# Altium PCB PCB.PcbDoc
Units mm, origin at the board's own origin, x right, y up, seen from the top; angles counter-clockwise.
Board outline 50 x 25.02 mm, 2 copper layers (Top Layer, Bottom Layer); 26 components, 21 nets, 92 pads, 11 vias.
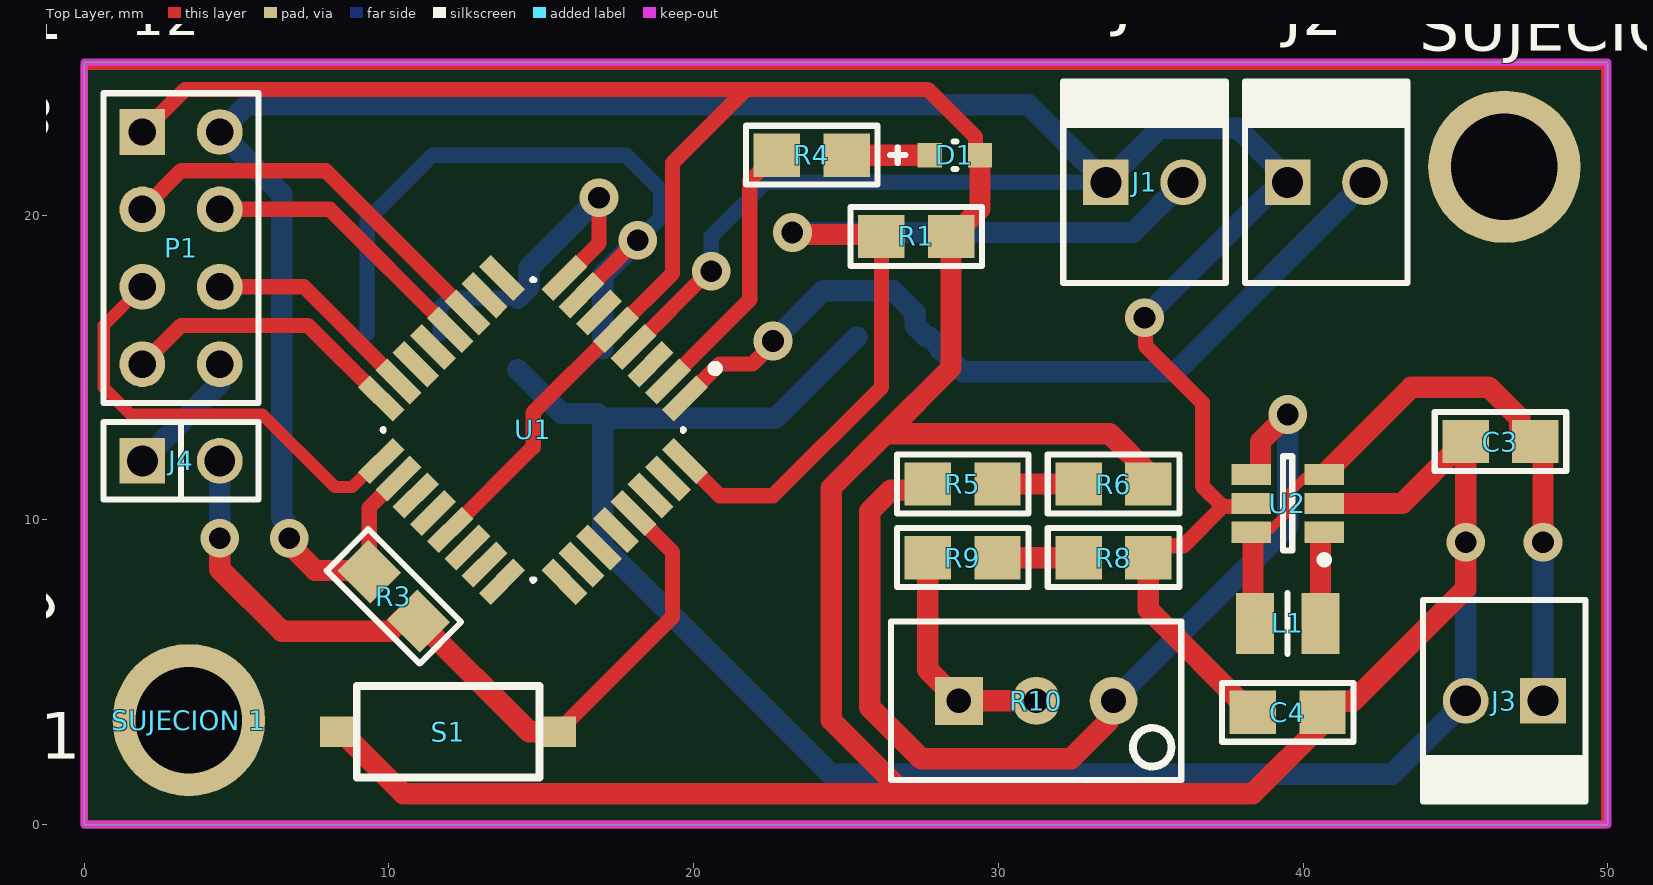
[diagram p0: Top Layer view]
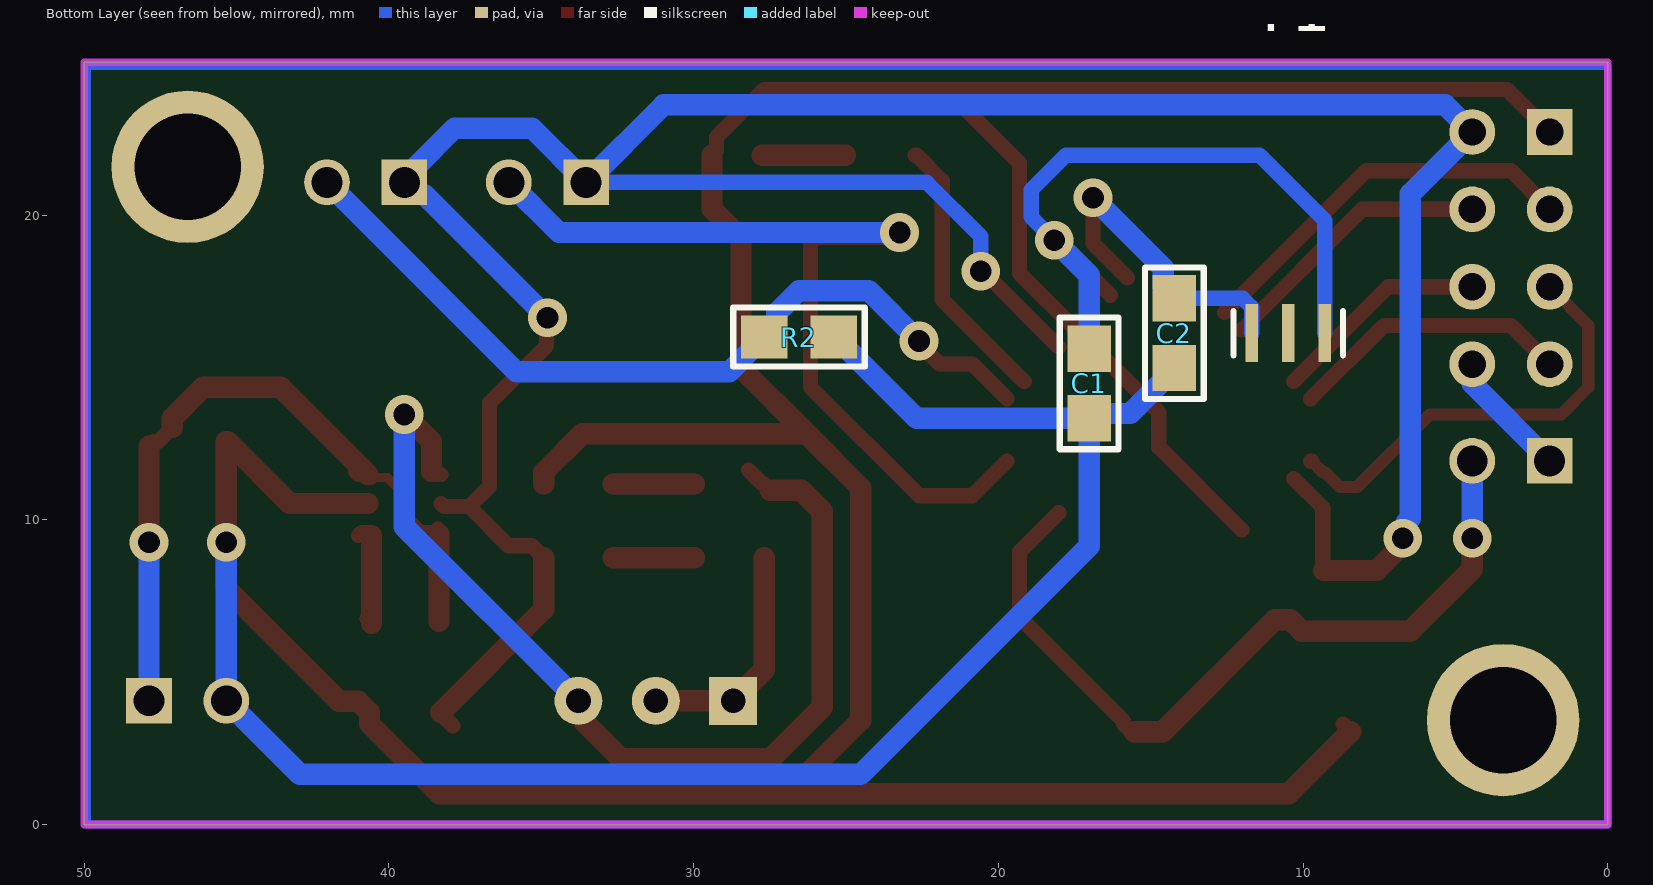
[diagram p1: Bottom Layer view, seen from below]
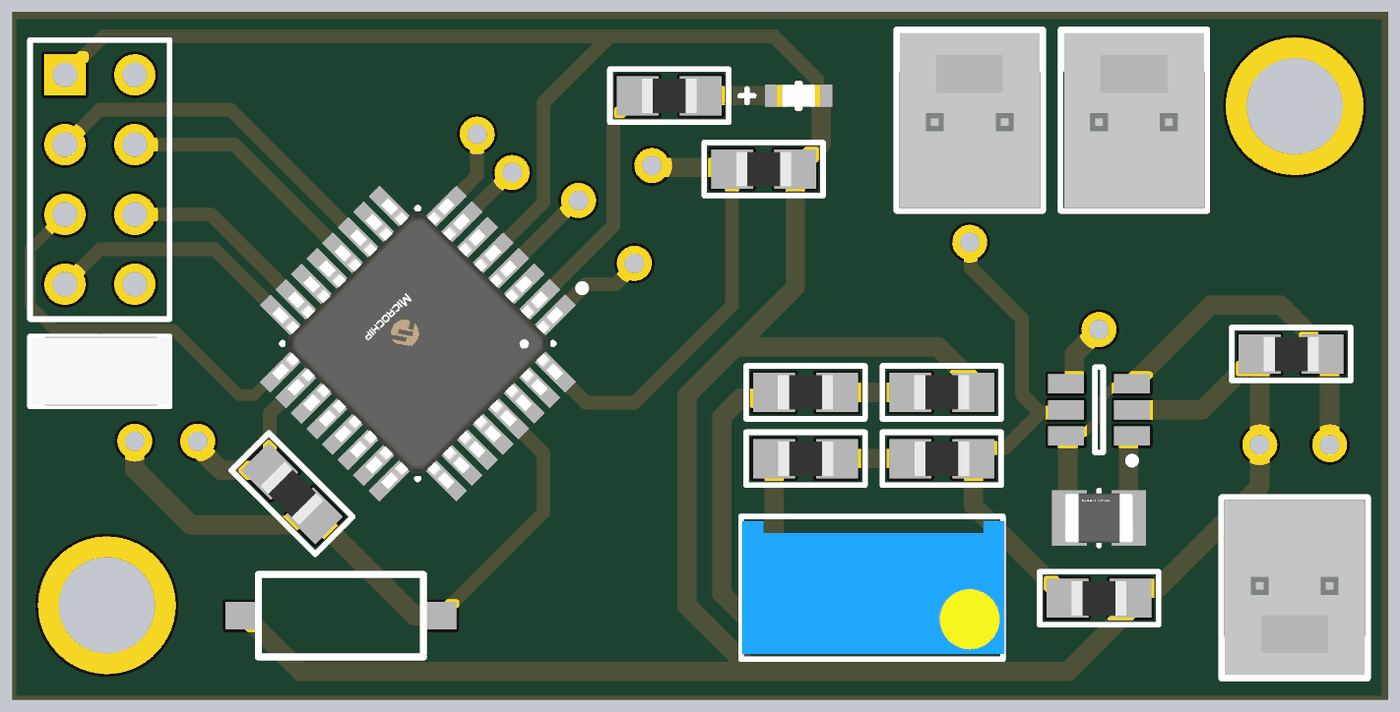
[diagram p2: 3D render of the assembled board from above, using the file's embedded part models]
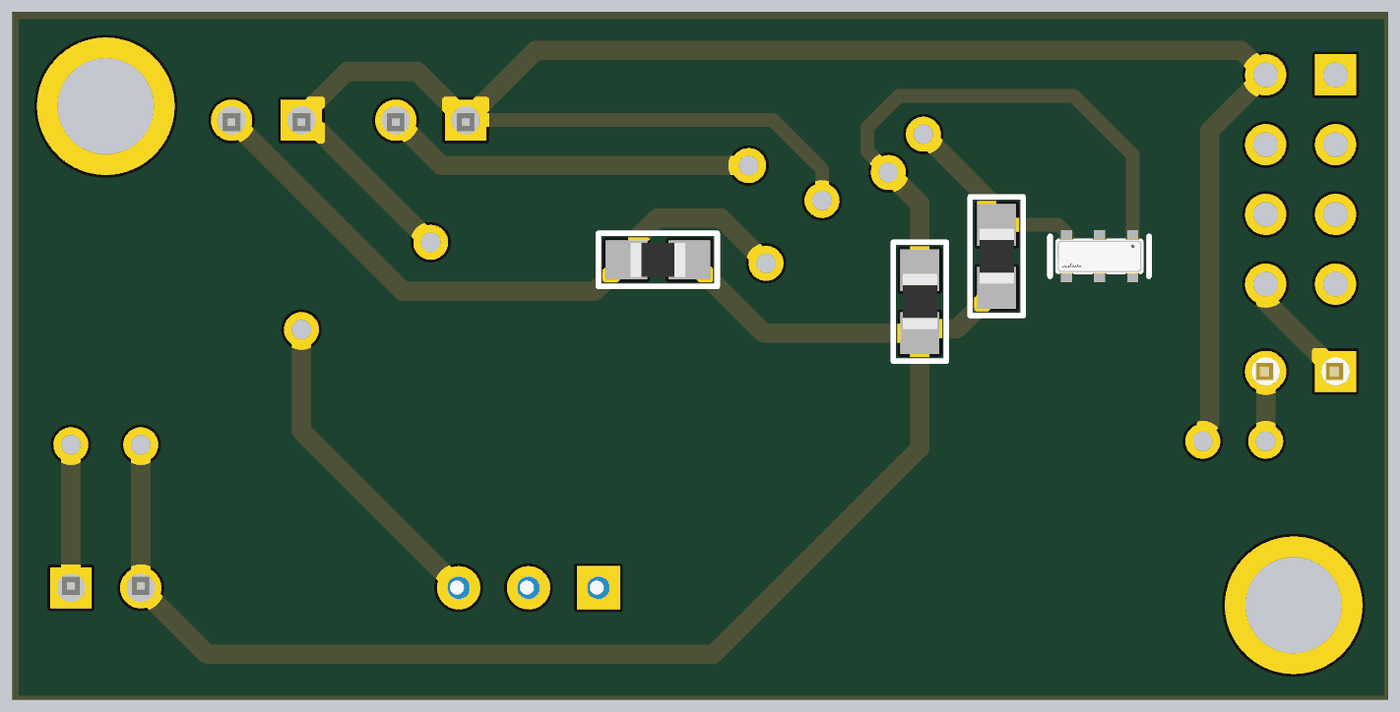
[diagram p3: 3D render of the assembled board from below, using the file's embedded part models]

## Layer stack, top to bottom
Top Solder: solder mask 0.0102, Solder Resist, Dk 3.5
Top Layer: signal copper 0.0356
Dielectric 1: dielectric 0.32, FR-4, Dk 4.8
Bottom Layer: signal copper 0.0356
Bottom Solder: solder mask 0.0102, Solder Resist, Dk 3.5

## Board outline
0,0 0,25.019 50,25.019 50,0

## Design rules (kind name [scope] priority, off if disabled: settings)
Clearance [All] p1: gap=0.1 ignorepadtopadclearanceinfootprint=FALSE
PolygonConnect [All] p1: connectstyle=Relief reliefconductorwidth=0.254 reliefentries=4 polygonreliefangle="90 Angle" airgapwidth=0.254
RoutingVias [All] p1: holewidth=0.711 width=1.27 viastyle="Through Hole" minholewidth=0.711 minwidth=1.27 maxholewidth=0.711 maxwidth=1.27
SolderMaskExpansion [All] p1: expansion=0.102 istentingtop=FALSE
Width [All] p1: maxlimit=0.7 minlimit=0.3 preferedwidth=0.5
30 further rules are at their usual default settings.

## Components (designator, comment, footprint, x,y, rotation, side; value= is the part's Value field where it differs from the comment)
C1 "22pF" 0805 17.018,14.478 r270 bottom
C2 "22pF" 0805 14.224,16.129 r270 bottom
C3 "4.7uF" 0805 46.482,12.573 r180 top
C4 "10uF" 0805 39.497,3.683 r0 top
D1 "LED" FP-AP1608SGC-MFG 28.575,21.971 r0 top
J1 "MOLEX2" MOLEX2 33.528,21.082 r0 top
J2 "MOLEX2" MOLEX2 39.497,21.082 r0 top
J3 "MOLEX2" MOLEX2 47.879,4.064 r180 top
J4 "JUMPER" JUMPER2 3.175,11.938 r0 top
L1 "4.7uH" FP-CB2518-IPC_B 39.497,6.604 r180 top
P1 "NRF24" HDR2X4 1.905,22.733 r270 top
R1 "10k" 0805 27.305,19.304 r180 top
R2 "10k" 0805 26.543,16.002 r0 bottom
R3 "1k" 0805 10.16,7.493 r315 top
R4 "1k" 0805 23.876,21.971 r0 top
R5 "560k" 0805 28.829,11.176 r0 top
R6 "2k" 0805 33.782,11.176 r0 top
R8 "750k" 0805 33.782,8.763 r180 top
R9 "220k" 0805 28.829,8.763 r180 top
R10 "10k" "PRESET V" 31.242,4.064 r0 top
S1 "SW" PCBComponent_1 11.938,3.048 r270 top
"SUJECION 1" "SUJECION" "SUJECION (5.00MM - 3.50MM)" 3.429,3.429 r90 top
"SUJECION 2" "SUJECION" "SUJECION (5.00MM - 3.50MM)" 46.609,21.59 r90 top
U1 "ATMEGA328PB-ANR" FP-C04-074-MFG 14.732,12.954 r225 top
U2 "MCP1640" MCHP-SOT-23-CHY6_M 39.497,10.541 r180 top
Y1 "16MHz" FP-CSTNE16M0V530000R0-MFG 10.484,16.129 r180 bottom

## Footprints (in the part's own frame and the unit in brackets; to place one, negate y for a bottom-side part, rotate by r counter-clockwise, add the part's x,y. Pads: shape width x height; smd on the part's side, far side on the other; paste and mask are expansions set on the pad)
0805 [mil] "Pasivo 0805"
  rect 60x56 smd: 1(-45,0) 2(45,0)
  silkscreen extent -85,-38 85,38, body extent -40,-25 39,25, height 15
FP-AP1608SGC-MFG [mm]
  rect 0.8x0.8 smd paste+0 mask+0: 1(-0.825,0) 2(0.825,0)
  silkscreen extent -2.12,-0.45 0.05,0.45, body extent -1.33,-0.55 1.33,0.55, height 0.25
FP-C04-074-MFG [mm]
  rect 1.6x0.55 smd paste+0 mask+0: 1(-4.25,2.8) 2(-4.25,2) 3(-4.25,1.2) 4(-4.25,0.4) 5(-4.25,-0.4) 6(-4.25,-1.2) 7(-4.25,-2) 8(-4.25,-2.8) 17(4.25,-2.8) 18(4.25,-2) 19(4.25,-1.2) 20(4.25,-0.4) 21(4.25,0.4) 22(4.25,1.2) 23(4.25,2) 24(4.25,2.8)
  rect 0.55x1.6 smd paste+0 mask+0: 9(-2.8,-4.25) 10(-2,-4.25) 11(-1.2,-4.25) 12(-0.4,-4.25) 13(0.4,-4.25) 14(1.2,-4.25) 15(2,-4.25) 16(2.8,-4.25) 25(2.8,4.25) 26(2,4.25) 27(1.2,4.25) 28(0.4,4.25) 29(-0.4,4.25) 30(-1.2,4.25) 31(-2,4.25) 32(-2.8,4.25)
  silkscreen extent -5.77,-3.5 3.5,3.5, body extent -5.15,-5.15 5.15,5.15, height 0.25
FP-CB2518-IPC_B [mm]
  rect 1.255x2.006 smd paste+0 mask+0: 1(-1.076,0) 2(1.076,0)
  silkscreen extent 0,-1 0,1, body extent -1.95,-1.25 1.95,1.25, height 0.25
FP-CSTNE16M0V530000R0-MFG [mm]
  rect 0.4x1.9 smd paste+0 mask+0: 1(1.2,0) 2(0,0) 3(-1.2,0)
  silkscreen extent -1.8,-0.72 1.8,0.72, body extent -1.6,-0.65 1.6,0.65, height 1
HDR2X4 [mm] "Connector; Header; 4x2 Position"
  rect 1.5x1.5 hole 0.9: 1(0,0)
  round 1.5 hole 0.9: 2(0,2.54) 3(2.54,0) 4(2.54,2.54) 5(5.08,0) 6(5.08,2.54) 7(7.62,0) 8(7.62,2.54)
  silkscreen extent -1.27,-1.27 8.89,3.81
JUMPER2 [mm]
  rect 1.5x1.5 hole 1.016: 1(-1.27,0)
  round 1.5 hole 1.016: 2(1.27,0)
  silkscreen extent -2.54,-1.27 2.54,1.27, body extent -2.46,-1.27 2.54,1.27, height 9.5
MCHP-SOT-23-CHY6_M [mm] "SOT23, 6-Leads, Body 2.9x1.55mm, Pitch 0.95mm, IPC Low Density"
  rect 1.3x0.7 smd: 1(-1.2,0.95) 2(-1.2,0) 3(-1.2,-0.95) 4(1.2,-0.95) 5(1.2,0) 6(1.2,0.95)
  silkscreen extent -1.33,-1.55 0.15,1.97, body extent -0.9,-1.55 0.9,1.55, height 1.45
MOLEX2 [mm]
  rect 1.5x1.5 hole 1.016: 1(0,0)
  round 1.5 hole 1.016: 2(2.54,0)
  silkscreen extent -1.4,-3.3 3.94,3.3, body extent -1.27,-3.17 3.81,3.17, height 10.74
PCBComponent_1 [mm]
  rect 1x1.2 smd: 1(0,3.6) 2(0,-3.6)
  silkscreen extent -1.5,-3 1.5,3
"PRESET V" [mil]
  rect 62x62 hole 32: 1(-100,0)
  round 62 hole 32: 2(0,0) 3(100,0)
  silkscreen extent -188,-102 188,102, body extent -185,-95 190,95, height 455
"SUJECION (5.00MM - 3.50MM)" [mm]
  round 5 hole 3.5: 1(0,0)

## Part data
C1 C2 C3 C4: library part CAP
D1: library part CMP-44529-000023-1, "Standard LEDs - SMD GREEN WATER CLEAR", Case/Package=0603, Color=Green, Forward Current=20mA, Forward Voltage=2.2V, Lens Color=Clear, Max Operating Temperature=85°C, Min Operating Temperature=-40°C, Package Quantity=2000, Illumination Color=Green, Lead Free="Lead Free", Lens Style=Clear, Luminous Intensity=15mcd, Mount="Surface Mount", Packaging="Tape and Reel", Viewing Angle=120°, Wavelength=568nm
L1: library part CMP-14484-000470-1, "SMD Inductors 4.7uH ±20% 1.2A 0.13Ω 1007", Case Code (Imperial)=1007, Case Code (Metric)=2518, Current Rating=1.2A, DC Resistance (DCR)=130mR, Inductance Tolerance=20%, Max Operating Temperature=105°C, Min Operating Temperature=-40°C, Package Quantity=2000, Resistor Type=Wirewound, Saturation Current=310mA, Self Resonant Frequency=46MHz, Test Frequency=7.96MHz, Case/Package=1007, Core Material=Ferrite, Depth=2mm, Halogen Free="Halogen Free", Height=1.8mm, Height - Seated (Max)=0.079inch, Inductance=4.7uH, Lead Free="Lead Free", Length=0.098inch, Max DC Current=1.2A, Mount="Surface Mount", Packaging="Tape and Reel", Radiation Hardening=No, RoHS Compliant=Yes, Series=CB, Shielding=Unshielded, Termination=SMD/SMT, Tolerance=20%, Width=0.071inch
P1: library part "Header 4X2", "Header, 4-Pin, Dual row", LatestRevisionDate=17-Jul-2002, LatestRevisionNote="Re-released for DXP Platform.", Publisher="Altium Limited"
R1 R2 R3 R4 R5 R6 R8 R9: library part RES
R10: library part PRESET
S1: library part "Nano RST SW", "Nano Reset SMD Switch"
U1: library part CMP-06276-000131-1, "IC MCU 8BIT 32KB FLASH 32TQFP", RoHS Compliant=Yes
U2: library part CMP-0139-00284-1, "Start-up Synchronous Boost Regulator with True Output Disconnect or Input / Output Bypass Option, 350 mA, Input Voltage 0.65 to 5.5 V, Output Voltage 2.0 to 5.5 V, -40 to 85 degC, 6-pin SOT-23 (CHY6), Tape and Reel", Manufacturer=Microchip, PartNumber=MCP1640CT-I/CHY, ComponentLink1Description="Manufacturer URL", ComponentLink1URL=http://www.microchip.com, ComponentLink2Description=Datasheet, ComponentLink2URL=http://ww1.microchip.com/downloads/en/DeviceDoc/22234B.pdf, ComponentLink3Description="Package Specification", ComponentLink3URL=http://www.microchip.com/stellent/groups/techpub_sg/documents/packagingspec/en012702.pdf, ComponentLink4Description="Product URL", ComponentLink4URL=http://www.microchip.com/MCP1640, DatasheetVersion="Rev. B", Mounting Technology="Surface Mount", PackageDescription="6-Lead Plastic Small Outline Transistor, 2.9 x 1.55 mm Body, 0.95 mm Pitch", PackageReference=SOT-23-CHY6, PackageVersion=C04-028B
Y1: library part CMP-06054-000001-1, "CERAMIC RES 16.0000MHZ 15PF SMD", Load Capacitance=15pF, Manufacturer=Murata, Manufacturer Part Number=CSTNE16M0V530000R0, Package=0, Temperature="-40°C to +85°C", Temperature Range High=+85°C, Temperature Range Low=-40°C, Tolerance=0.5%, Automotive=No, Category=Crys, ComponentLink2Description=Datasheet, ComponentLink2URL=https://www.murata.com/en-sg/products/productdata/8801162231838/SPEC-CSTNE16M0V530000R0.pdf?1545967809000, Device Class L1="Passive Components", Device Class L2="Crystals / Oscillators", Device Class L3=Crystals, Digikey Description="CERAMIC RES 16.0000MHZ 15PF SMD", Esr=40Ω, Frequency=16MHz, Height=1mm, Lead Free=Yes, Mouser Description="Ceramic Resonator 16MHz ±0.5% (Tol) ±0.3% (Stability) 15pF 40Ohm 3-Pin CSMD T/R", Octopart=https://octopart.com/cstne16m0v530000r0-murata-91406924, RoHS=TRUE, Series=CSTNE_V, Stability=0.3%

## Via types
v1: diameter 1.27, hole 0.711, Top Layer to Bottom Layer, 11 vias

## Nets (pads, with @x,y where several pads share a name; then routed paths per layer and width w, separated by ;. In a path a pad name is that pad's centre, name@x,y a point inside that pad or via, vN(x,y) a via of type N, cw(c..) or ccw(c..) an arc to the next point about the centre after c; other vN are vias at no path point)
3V3: C4.1 J1.1 J2.1 P1.2 R3.1 R8.1 U1.4 U1.18 U2.5 | length 102.5
  Top Layer w0.5: v1@6.731,9.19 v1(6.731,9.398) ; R3.1@9.316,8.337 R3.1 ; R3.1@9.352,8.37 9.352,10.402 U1.18 ; U1.4 20.505,18.161 v1(20.574,18.161) ; v1(34.798,16.637) 34.833,16.602 34.833,15.713 36.703,13.843 36.703,11.103 37.365,10.441 ; R8.1 35.311,9.149 36.073,9.149 37.365,10.441 ; C4.1@37.905,3.234 C4.1 C4.1@38.303,3.683 ; U2.5 38.197,10.441 37.365,10.441
  Top Layer w0.7: v1@6.731,9.19 7.583,8.337 R3.1@9.316,8.337 ; R8.1 34.925,7.061 C4.1@38.303,3.683
  Bottom Layer w0.5: v1(6.731,9.398) v1@6.731,9.606 ; v1(20.574,18.161) 20.574,19.304 22.352,21.082 J1.1 ; J2.1 J2.1@39.497,21.209
  Bottom Layer w0.7: v1@6.731,9.606 6.677,9.606 6.622,9.661 6.622,9.91 6.477,10.055 6.477,20.701 P1.2 5.334,23.622 30.988,23.622 J1.1 35.306,22.86 37.846,22.86 39.097,21.609 39.097,21.482 39.37,21.209 J2.1@39.497,21.209 ; v1(34.798,16.637) 38.843,20.682 39.097,20.682 J2.1
AUX: J4.1 P1.8 | length 4.4
  Bottom Layer w0.7: J4.1 4.445,14.478 P1.8 P1.8@4.292,14.96
CE: P1.3 U1.11 | length 13.1
  Top Layer w0.5: P1.3 3.175,21.463 7.92,21.463 U1.11
CSN: P1.4 U1.12 | length 9.2
  Top Layer w0.5: P1.4 8.059,20.193 U1.12
GND: C1.2 C2.2 C3.2 C4.2 D1.2 J3.2 P1.1 R1.1 R2.1 R6.2 S1.2 U1.5 U1.21 U2.2 | length 187.9
  Top Layer w0.5: P1.1 3.302,24.13 21.717,24.13 ; S1.2 8.438,3.048 S1.2@8.688,3.298 ; U1.21 14.732,12.388 14.732,13.52 U1.5 19.304,18.092 19.304,21.717 21.717,24.13 ; R1.1 R1.1@28.499,19.304 ; D1.2 29.25,22.121 29.25,22.566 27.686,24.13 21.717,24.13 ; J3.2@45.068,4.064 J3.2 ; 45.276,7.683 45.339,7.747 ; C3.2@45.288,12.573 C3.2
  Top Layer w0.7: S1.2@8.438,3.048 10.47,1.016 26.924,1.016 ; R1.1 28.448,14.986 26.289,12.827 ; R1.1@28.499,19.304 29.4,20.205 D1.2 ; R6.2 34.925,11.557 33.655,12.827 26.289,12.827 ; U2.2 43.256,10.541 C3.2@45.288,12.573 ; 45.276,7.683 41.636,4.044 41.001,4.044 C4.2 40.64,3.302 38.354,1.016 26.924,1.016 ; 45.339,7.747 v1(45.339,9.271) C3.2 ; 26.289,12.827 24.511,11.049 24.511,3.429 26.924,1.016
  Bottom Layer w0.5: C2.2@14.224,14.935 C2.2 ; R2.1@25.349,16.002 R2.1
  Bottom Layer w0.7: C2.2@14.224,14.935 15.667,13.492 16.861,13.492 C1.2 ; R2.1@25.349,16.002 22.682,13.335 C1.2 ; v1(45.339,9.271) J3.2 42.926,1.651 24.511,1.651 17.018,9.144 C1.2
LED: R4.1 U1.2 | length 8.9
  Top Layer w0.5: U1.2 21.844,17.238 21.844,21.133 22.682,21.971 R4.1
MISO: P1.7 U1.16 | length 9.4
  Top Layer w0.5: P1.7 3.175,16.383 7.343,16.383 U1.16
MOSI: P1.6 U1.15 | length 7.2
  Top Layer w0.5: P1.6 7.205,17.653 U1.15
NetC3_1: C3.1 J3.1 L1.2 U2.3 U2.6 | length 24.8
  Top Layer w0.3: U2.6@38.397,9.691 38.942,9.691 39.422,10.171 39.422,10.761 40.052,11.391 U2.3@40.597,11.391
  Top Layer w0.5: L1.2@38.359,6.666 L1.2 ; U2.6@38.359,9.529 U2.6 U2.6@38.397,9.691 ; U2.3@40.597,11.391 U2.3 40.997,11.491 U2.3@41.097,11.591 ; C3.1@47.113,13.034 47.574,12.573 C3.1 47.727,12.573 C3.1@47.879,12.421
  Top Layer w0.7: L1.2@38.359,6.666 U2.6@38.359,9.529 ; U2.3 43.557,14.351 46.101,14.351 47.113,13.339 C3.1@47.113,13.034 ; J3.1@47.816,4.127 J3.1 ; v1(47.879,9.271) C3.1@47.879,12.421
  Bottom Layer w0.7: J3.1 v1(47.879,9.271)
NetD1_1: D1.1 R4.2 | length 2.7
  Top Layer w0.7: R4.2 D1.1
NetL1_1: L1.1 U2.1 | length 3.6
  Top Layer w0.5: L1.1 L1.1@40.724,6.755 ; U2.1@40.573,9.491 40.673,9.591 U2.1 40.897,9.591 U2.1@40.997,9.491
  Top Layer w0.7: L1.1 U2.1@40.573,9.491
NetR5_2: R5.2 R6.1 | length 2.7
  Top Layer w0.7: R5.2 R6.1
NetR8_2: R8.2 R9.1 | length 2.7
  Top Layer w0.7: R9.1 R8.2
NetR9_2: R9.2 R10.1 R10.2 | length 7.7
  Top Layer w0.7: R9.2 27.686,5.08 R10.1 R10.2
RESET: J4.2 R3.2 S1.1 U1.29 | length 26.5
  Top Layer w0.5: S1.1 15.638,3.048 15.888,3.298 15.888,3.398 19.304,6.814 19.304,8.948 U1.29
  Top Layer w0.7: v1(4.445,9.398) 4.445,8.382 6.477,6.35 10.051,6.35 10.421,6.721 10.932,6.721 R3.2 14.605,3.048 S1.1
  Bottom Layer w0.7: v1(4.445,9.398) J4.2
SCK: P1.5 U1.17 | length 14.6
  Top Layer w0.4: P1.5 0.635,16.383 0.635,14.351 1.524,13.462 5.842,13.462 8.226,11.078 8.79,11.078 9.27,11.557 9.34,11.557 U1.17@9.712,11.929
  Top Layer w0.5: U1.17@9.712,11.929 U1.17
SW1: J1.2 R1.2 U1.32 | length 29.8
  Top Layer w0.5: U1.32 20.851,10.795 22.606,10.795 26.162,14.351 R1.2 R1.2@26.098,19.367 ; v1(23.241,19.431) v1@23.304,19.367
  Top Layer w0.7: v1@23.304,19.367 R1.2@26.098,19.367
  Bottom Layer w0.7: v1(23.241,19.431) 34.417,19.431 J1.2
SW2: J2.2 R2.2 U1.1 | length 28.2
  Top Layer w0.5: U1.1 20.851,15.113 21.928,15.113 22.606,15.791 v1(22.606,15.875) ; J2.2 J2.2@42.037,21.463
  Bottom Layer w0.7: v1(22.606,15.875) 24.257,17.526 26.543,17.526 27.274,16.795 27.274,16.363 27.635,16.002 27.737,16.002 28.098,15.641 28.098,15.59 28.829,14.859 35.814,14.859 J2.2
VFB: R5.1 R10.3 U2.4 | length 33.6
  Top Layer w0.5: R5.1@27.483,10.973 R5.1 27.737,11.176 R5.1@28.198,11.637 ; U2.4 38.507,11.491 U2.4@38.607,11.591
  Top Layer w0.7: R5.1@27.483,10.973 26.467,10.973 25.781,10.287 25.781,3.849 27.471,2.159 32.385,2.159 33.615,3.389 33.615,3.897 R10.3 ; U2.4@38.607,11.591 38.607,12.572 v1(39.497,13.462)
  Bottom Layer w0.7: R10.3 39.497,9.779 v1(39.497,13.462)
XTAL1: C1.1 U1.7 Y1.1 | length 23.2
  Top Layer w0.5: U1.7 v1@18.127,19.177
  Bottom Layer w0.5: Y1.1 9.284,19.825 11.43,21.971 17.78,21.971 18.923,20.828 18.923,19.939 v1(18.161,19.177)
  Bottom Layer w0.7: C1.1 17.018,18.034 v1(18.161,19.177)
XTAL2: C2.1 U1.8 Y1.3 | length 11
  Top Layer w0.5: U1.8 16.891,19.073 v1(16.891,20.574)
  Bottom Layer w0.5: Y1.3 11.684,16.979 11.977,17.272 C2.1
  Bottom Layer w0.7: C2.1 14.585,17.633 14.585,18.268 v1(16.891,20.574)
pads on no net: "SUJECION 1.1" "SUJECION 2.1" U1.3 U1.6 U1.9 U1.10 U1.13 U1.14 U1.19 U1.20 U1.22 U1.23 U1.24 U1.25 U1.26 U1.27 U1.28 U1.30 U1.31 Y1.2
copper on no net: | length 299.2
  Top Layer w0.254: 0,0 49.911,0 49.911,24.892 0,24.892 0,0
  Bottom Layer w0.254: 0,0 49.911,0 49.911,24.892 0,24.892 0,0

## Keep-outs
Keep-Out Layer:
  the board outline again, w0.254

## Text inside footprints (layer, text, board x,y; h text height)
P1: Top Overlay "8" at -1.016,23.876 h1.27 r180; Top Overlay "7" at -3.302,22.606 h1.27; Top Overlay "1" at 1.524,25.908 h1.27; Top Overlay "2" at 2.667,25.908 h1.27